# Altium PCB placaConversor.PcbDoc
Units mm, origin at the board's own origin, x right, y up, seen from the top; angles counter-clockwise.
Board outline 165 x 67.5 mm, 2 copper layers (Top Layer, Bottom Layer); 113 components, 68 nets, 284 pads, 59 vias.
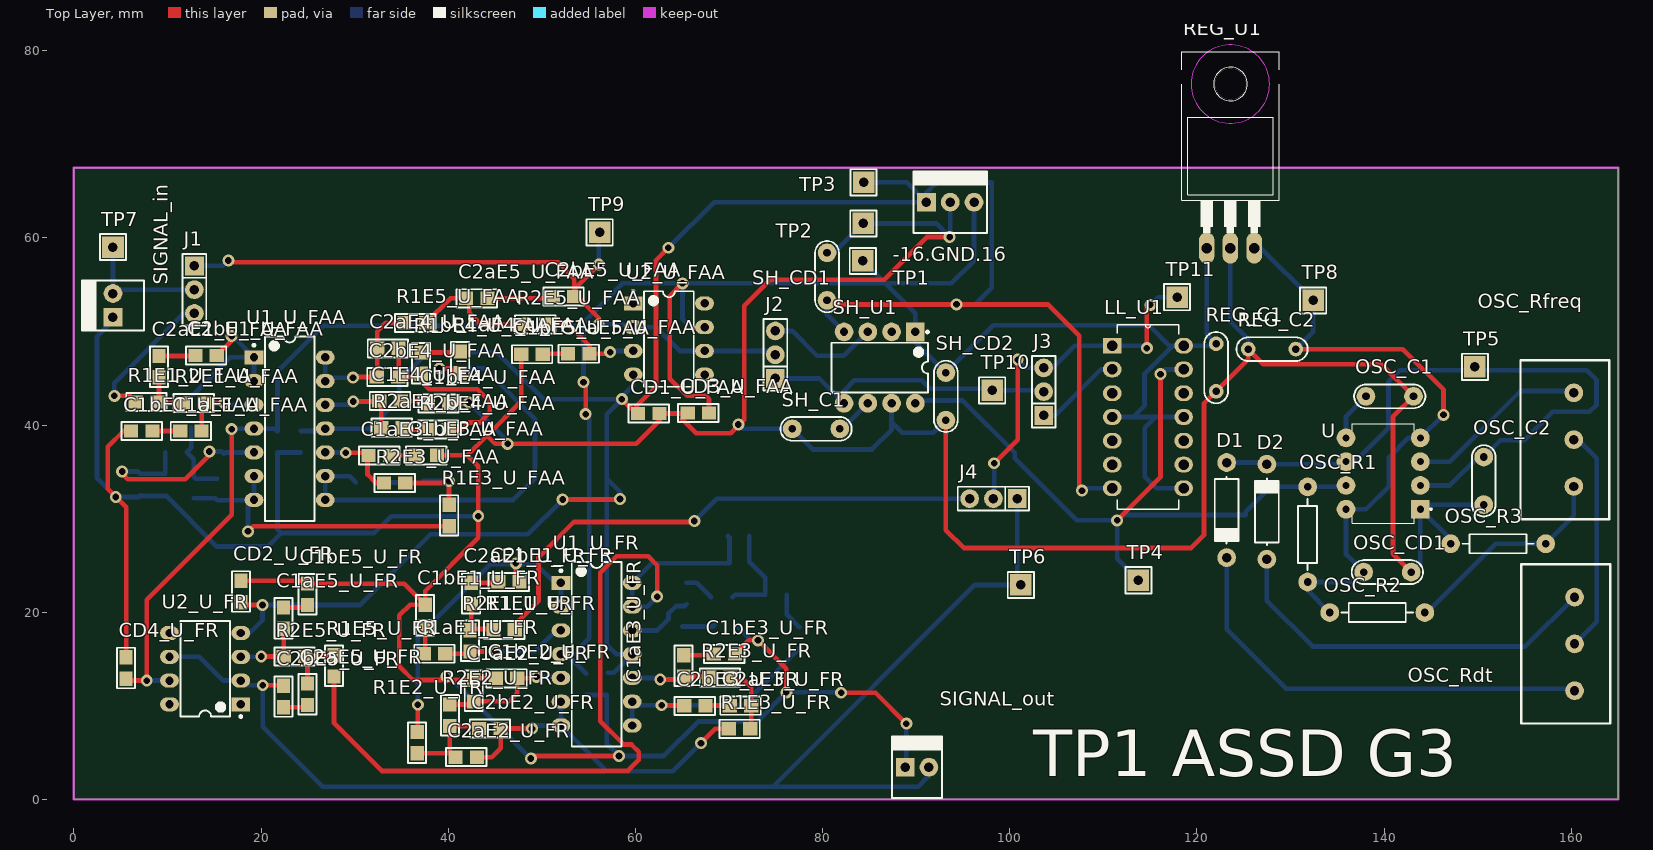
[diagram p0: Top Layer view]
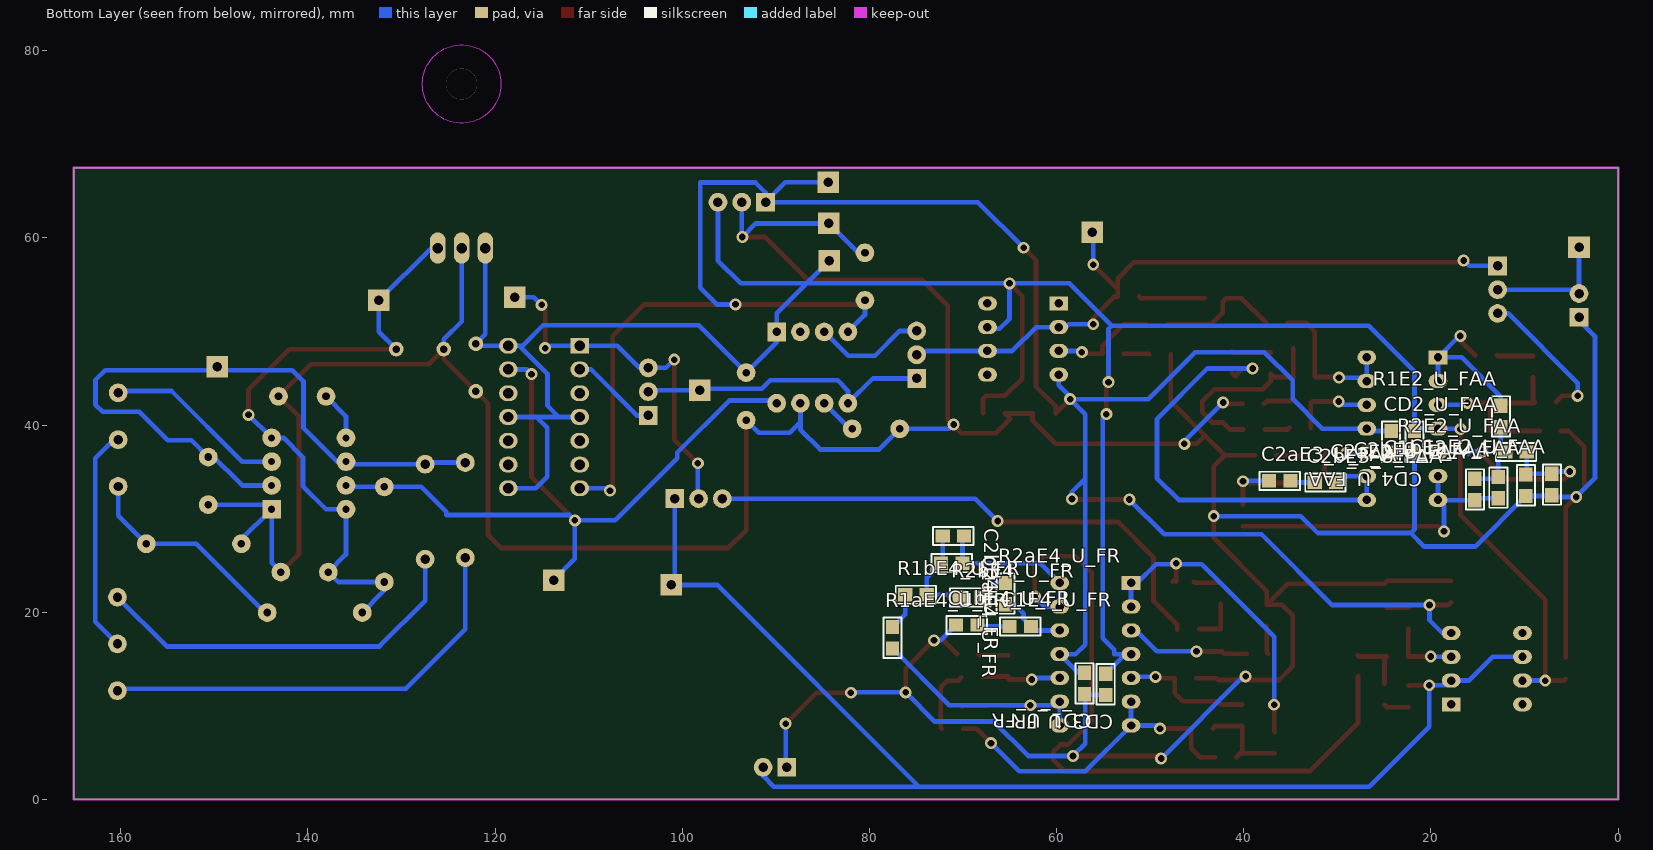
[diagram p1: Bottom Layer view, seen from below]
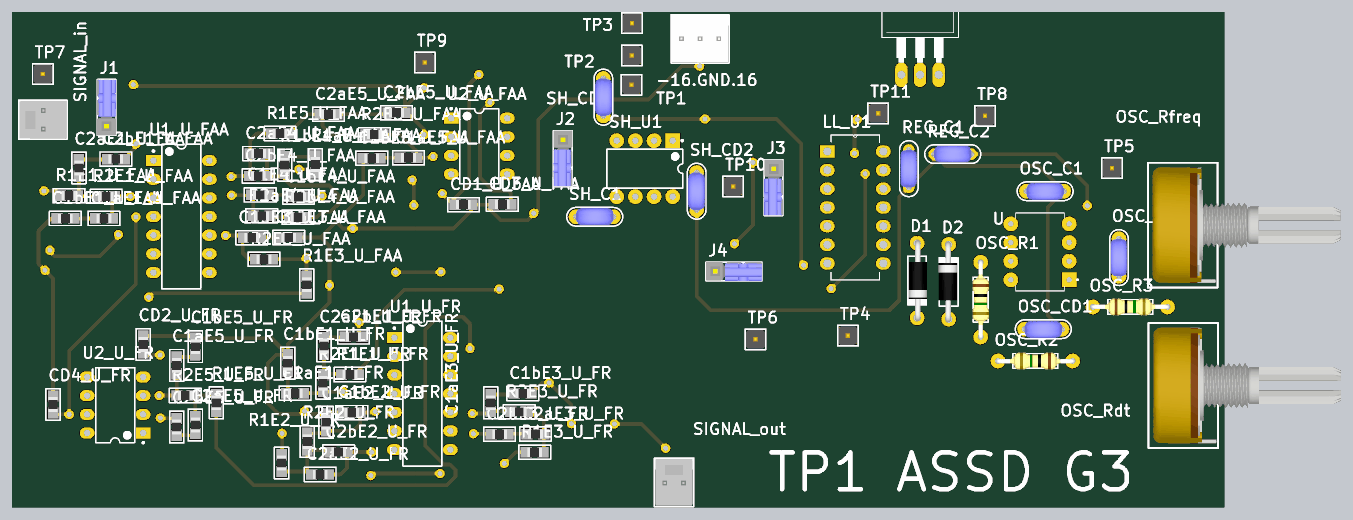
[diagram p2: 3D render of the assembled board from above, using the file's embedded part models]
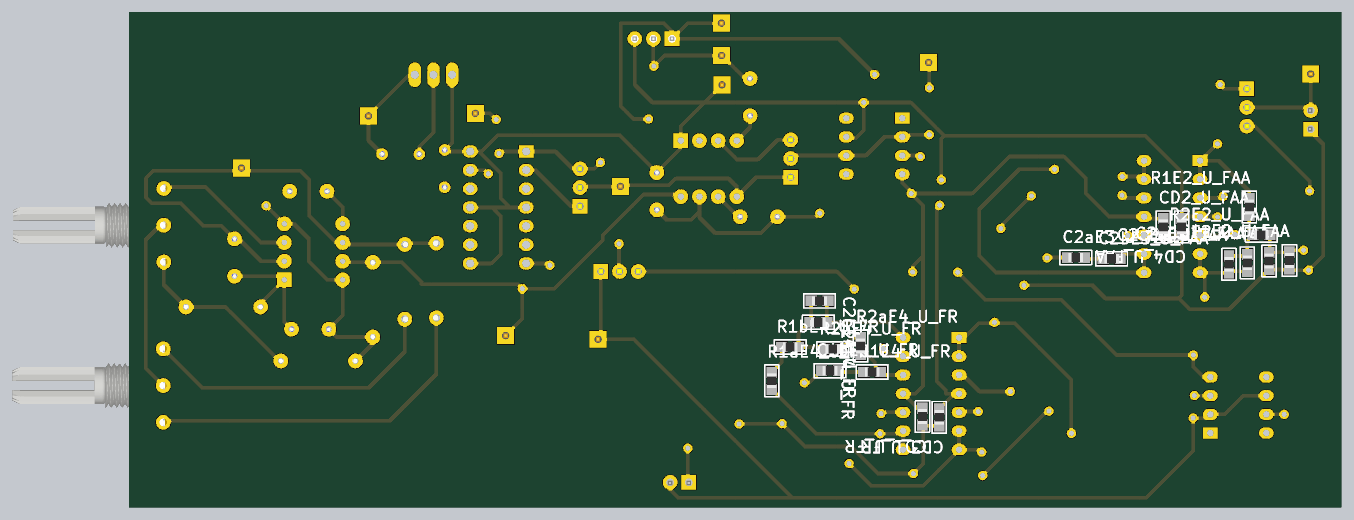
[diagram p3: 3D render of the assembled board from below, using the file's embedded part models]

## Layer stack, top to bottom
Top Solder: solder mask 0.0102, Solder Resist, Dk 3.5
Top Layer: signal copper 0.0356
Dielectric 1: dielectric 0.32, FR-4, Dk 4.8
Bottom Layer: signal copper 0.0356
Bottom Solder: solder mask 0.0102, Solder Resist, Dk 3.5

## Board outline
0,0 165,0 165,67.5 0,67.5

## Design rules (kind name [scope] priority, off if disabled: settings)
Clearance [All] p1: gap=0.254
PolygonConnect [All] p1: connectstyle=Relief reliefconductorwidth=0.254 reliefentries=4 polygonreliefangle="90 Angle" airgapwidth=0.254
RoutingVias [All] p1: holewidth=0.711 width=1.27 viastyle="Through Hole" minholewidth=0.711 minwidth=1.27 maxholewidth=0.711 maxwidth=1.27
SolderMaskExpansion [All] p1: expansion=0.102
Width [All] p1: maxlimit=0.5 minlimit=0.5 preferedwidth=0.5
30 further rules are at their usual default settings.

## Classes and differential pairs
component class main: -16.GND.16 J1 J2 J3 J4 SIGNAL_in SIGNAL_out TP1 TP2 TP3 TP4 TP5 TP6 TP7 TP8 TP9 TP10 TP11
component class U_FAA: C1aE1_U_FAA C1aE2_U_FAA C1aE3_U_FAA C1aE5_U_FAA C1bE1_U_FAA C1bE2_U_FAA C1bE3_U_FAA C1bE4_U_FAA C1bE5_U_FAA C1E4_U_FAA C2aE1_U_FAA C2aE2_U_FAA C2aE3_U_FAA C2aE4_U_FAA C2aE5_U_FAA C2bE1_U_FAA C2bE2_U_FAA C2bE3_U_FAA C2bE4_U_FAA C2bE5_U_FAA CD1_U_FAA CD2_U_FAA CD3_U_FAA CD4_U_FAA R1aE4_U_FAA R1bE4_U_FAA R1E1_U_FAA R1E2_U_FAA R1E3_U_FAA R1E5_U_FAA R2aE4_U_FAA R2bE4_U_FAA R2E1_U_FAA R2E2_U_FAA R2E3_U_FAA R2E5_U_FAA U1_U_FAA U2_U_FAA
component class U_FR: C1aE1_U_FR C1aE2_U_FR C1aE3_U_FR C1aE5_U_FR C1bE1_U_FR C1bE2_U_FR C1bE3_U_FR C1bE4_U_FR C1bE5_U_FR C1E4_U_FR C2aE1_U_FR C2aE2_U_FR C2aE3_U_FR C2aE4_U_FR C2aE5_U_FR C2bE1_U_FR C2bE2_U_FR C2bE3_U_FR C2bE4_U_FR C2bE5_U_FR CD1_U_FR CD2_U_FR CD3_U_FR CD4_U_FR R1aE4_U_FR R1bE4_U_FR R1E1_U_FR R1E2_U_FR R1E3_U_FR R1E5_U_FR R2aE4_U_FR R2bE4_U_FR R2E1_U_FR R2E2_U_FR R2E3_U_FR R2E5_U_FR U1_U_FR U2_U_FR
component class U_Llave_analogica: LL_U1
component class U_Oscilador: D1 D2 OSC_C1 OSC_C2 OSC_CD1 OSC_R1 OSC_R2 OSC_R3 OSC_Rdt OSC_Rfreq
component class U_Regulator: REG_C1 REG_C2 REG_U1
component class U_Sample_and_hold: SH_C1 SH_CD1 SH_CD2 SH_U1
channel class Filtro: U_FAA U_FR

## Components (designator, comment, footprint, x,y, rotation, side; value= is the part's Value field where it differs from the comment)
-16.GND.16 "MOLEX3" MOLEX3 91.1,63.825 r0 top (schematic designator POWER)
C1aE1_U_FAA "CAP" 0805 12.5,39.375 r180 top (schematic designator C1aE1)
C1aE1_U_FR "CAP" 0805 38.525,15.575 r180 top (schematic designator C1aE1)
C1aE2_U_FAA "CAP" 0805 7.075,33.65 r270 bottom (schematic designator C1aE2)
C1aE2_U_FR "CAP" 0805 42.725,11.625 r90 top (schematic designator C1aE2)
C1aE3_U_FAA "CAP" 0805 32.625,36.75 r0 top (schematic designator C1aE3)
C1aE3_U_FR "CAP" 0805 65.15,14.275 r90 top (schematic designator C1aE3)
C1aE5_U_FAA "CAP" 0805 53.95,47.625 r180 top (schematic designator C1aE5)
C1aE5_U_FR "CAP" 0805 22.4,19.375 r90 top (schematic designator C1aE5)
C1bE1_U_FAA "CAP" 0805 7.25,39.375 r180 top (schematic designator C1bE1)
C1bE1_U_FR "CAP" 0805 37.525,19.675 r90 top (schematic designator C1bE1)
C1bE2_U_FAA "CAP" 0805 9.85,33.575 r270 bottom (schematic designator C1bE2)
C1bE2_U_FR "CAP" 0805 46.225,12.95 r180 top (schematic designator C1bE2)
C1bE3_U_FAA "CAP" 0805 37.65,36.775 r0 top (schematic designator C1bE3)
C1bE3_U_FR "CAP" 0805 69.5,15.55 r0 top (schematic designator C1bE3)
C1bE4_U_FAA "CAP" 0805 38.975,42.3 r0 top (schematic designator C1bE4)
C1bE4_U_FR "CAP" 0805 69.6,18.65 r0 bottom (schematic designator C1bE4)
C1bE5_U_FAA "CAP" 0805 48.95,47.575 r180 top (schematic designator C1bE5)
C1bE5_U_FR "CAP" 0805 24.95,21.925 r90 top (schematic designator C1bE5)
C1E4_U_FAA "CAP" 0805 33.775,42.575 r0 top (schematic designator C1E4)
C1E4_U_FR "CAP" 0805 63.875,18.475 r0 bottom (schematic designator C1E4)
C2aE1_U_FAA "CAP" 0805 9.1,46.25 r90 top (schematic designator C2aE1)
C2aE1_U_FR "CAP" 0805 42.45,22.025 r90 top (schematic designator C2aE1)
C2aE2_U_FAA "CAP" 0805 15.3,33.125 r270 bottom (schematic designator C2aE2)
C2aE2_U_FR "CAP" 0805 41.925,4.525 r0 top (schematic designator C2aE2)
C2aE3_U_FAA "CAP" 0805 36.15,34.05 r180 bottom (schematic designator C2aE3)
C2aE3_U_FR "CAP" 0805 71.225,10.025 r180 top (schematic designator C2aE3)
C2aE4_U_FAA "CAP" 0805 33.55,48.2 r180 top (schematic designator C2aE4)
C2aE4_U_FR "CAP" 0805 71.2,25.25 r180 bottom (schematic designator C2aE4)
C2aE5_U_FAA "CAP" 0805 43.05,53.55 r0 top (schematic designator C2aE5)
C2aE5_U_FR "CAP" 0805 24.95,11.25 r270 top (schematic designator C2aE5)
C2bE1_U_FAA "CAP" 0805 14.125,47.45 r0 top (schematic designator C2bE1)
C2bE1_U_FR "CAP" 0805 46.475,23.25 r0 top (schematic designator C2bE1)
C2bE2_U_FAA "CAP" 0805 12.8,33.325 r270 bottom (schematic designator C2bE2)
C2bE2_U_FR "CAP" 0805 44.45,7.575 r0 top (schematic designator C2bE2)
C2bE3_U_FAA "CAP" 0805 31.275,33.875 r180 bottom (schematic designator C2bE3)
C2bE3_U_FR "CAP" 0805 66.35,10 r180 top (schematic designator C2bE3)
C2bE4_U_FAA "CAP" 0805 33.5,45.15 r180 top (schematic designator C2bE4)
C2bE4_U_FR "CAP" 0805 71.025,28.15 r180 bottom (schematic designator C2bE4)
C2bE5_U_FAA "CAP" 0805 52.325,53.75 r0 top (schematic designator C2bE5)
C2bE5_U_FR "CAP" 0805 22.4,11 r90 top (schematic designator C2bE5)
CD1_U_FAA "CAP" 0805 61.425,41.25 r0 top (schematic designator CD1)
CD1_U_FR "CAP" 0805 57.025,12.4 r270 bottom (schematic designator CD1)
CD2_U_FAA "CAP" 0805 24.25,38.225 r270 bottom (schematic designator CD2)
CD2_U_FR "CAP" 0805 17.85,22.225 r90 top (schematic designator CD2)
CD3_U_FAA "CAP" 0805 66.725,41.3 r180 top (schematic designator CD3)
CD3_U_FR "CAP" 0805 54.75,12.3 r270 bottom (schematic designator CD3)
CD4_U_FAA "CAP" 0805 21.75,38.225 r270 bottom (schematic designator CD4)
CD4_U_FR "CAP" 0805 5.575,14.05 r90 top (schematic designator CD4)
D1 "1n4148" DO41 123.175,30.925 r270 top
D2 "1n4148" DO41 127.475,30.75 r90 top
J1 "J_FAA" JUMPER3 12.875,54.475 r270 top
J2 "J_SH" JUMPER3 74.95,47.525 r90 top
J3 "J_LL" JUMPER3 103.625,43.575 r90 top
J4 "J_FR" JUMPER3 98.25,32.15 r180 top
LL_U1 "CD4066BE" DIP254P762X508-14 118.575,33.25 r0 top
OSC_C1 "10n" CAP200#1 140.6,43.075 r0 top
OSC_C2 "1n" CAP200#1 150.65,34.05 r270 top
OSC_CD1 "100n" CAP200#1 140.35,24.3 r0 top
OSC_R1 "2k2" RES400 131.825,33.4 r270 top
OSC_R2 "10k" RES400 144.35,19.975 r180 top
OSC_R3 "10k" RES400 147.1,27.325 r0 top
OSC_Rdt "45k" POTENCIOMETRO 160.35,16.625 r90 top
OSC_Rfreq "4k" POTENCIOMETRO 160.275,38.45 r90 top
R1aE4_U_FAA "RES" 0805 41.275,46.725 r90 top (schematic designator R1aE4)
R1aE4_U_FR "RES" 0805 77.525,17.275 r90 bottom (schematic designator R1aE4)
R1bE4_U_FAA "RES" 0805 37.1,46.625 r270 top (schematic designator R1bE4)
R1bE4_U_FR "RES" 0805 75.025,21.875 r180 bottom (schematic designator R1bE4)
R1E1_U_FAA "RES" 0805 7.75,42.475 r0 top (schematic designator R1E1)
R1E1_U_FR "RES" 0805 45.975,18.125 r180 top (schematic designator R1E1)
R1E2_U_FAA "RES" 0805 12.525,40.925 r270 bottom (schematic designator R1E2)
R1E2_U_FR "RES" 0805 36.675,6.075 r270 top (schematic designator R1E2)
R1E3_U_FAA "RES" 0805 40.1,30.35 r90 top (schematic designator R1E3)
R1E3_U_FR "RES" 0805 71.125,7.55 r0 top (schematic designator R1E3)
R1E5_U_FAA "RES" 0805 36.475,50.925 r0 top (schematic designator R1E5)
R1E5_U_FR "RES" 0805 27.8,14.275 r90 top (schematic designator R1E5)
R2aE4_U_FAA "RES" 0805 33.975,39.725 r180 top (schematic designator R2aE4)
R2aE4_U_FR "RES" 0805 65.45,22 r270 bottom (schematic designator R2aE4)
R2bE4_U_FAA "RES" 0805 38.9,39.525 r180 top (schematic designator R2bE4)
R2bE4_U_FR "RES" 0805 69.225,21.6 r180 bottom (schematic designator R2bE4)
R2E1_U_FAA "RES" 0805 12.8,42.375 r0 top (schematic designator R2E1)
R2E1_U_FR "RES" 0805 42.325,16.95 r270 top (schematic designator R2E1)
R2E2_U_FAA "RES" 0805 10.9,37.125 r180 bottom (schematic designator R2E2)
R2E2_U_FR "RES" 0805 40.175,9 r90 top (schematic designator R2E2)
R2E3_U_FAA "RES" 0805 34.275,33.825 r180 top (schematic designator R2E3)
R2E3_U_FR "RES" 0805 69.025,13.05 r180 top (schematic designator R2E3)
R2E5_U_FAA "RES" 0805 49.3,50.775 r0 top (schematic designator R2E5)
R2E5_U_FR "RES" 0805 23.575,15.275 r180 top (schematic designator R2E5)
REG_C1 "0.22uF" CAP200#2 122.05,46.15 r270 top
REG_C2 "0.1uF" CAP200#2 128.025,48.125 r180 top
REG_U1 "LM7805" TO220 123.575,65.275 r0 top
SH_C1 "4n" CAP200#1 79.3,39.6 r180 top
SH_CD1 "100n" CAP200#1 80.475,55.875 r90 top
SH_CD2 "100n" CAP200#1 93.175,43.075 r270 top
SH_U1 "LF398N" N08E 86.1,46.15 r270 top
SIGNAL_in "ALOJ_POL1" MOLEX2 4.175,51.525 r90 top
SIGNAL_out "ALOJ_POL1" MOLEX2 88.825,3.45 r0 top
TP1 "16V" TPTH 84.3,57.55 r0 top
TP2 "GND" TPTH 84.35,61.55 r0 top
TP3 "-16V" TPTH 84.375,65.95 r0 top
TP4 "PULSE" TPTH 113.75,23.425 r0 top
TP5 "OSC_CAP" TPTH 149.7,46.225 r0 top
TP6 "SIGNAL_OUT" TPTH 101.175,22.925 r0 top
TP7 "SIGNAL_IN" TPTH 4.175,59.025 r0 top
TP8 "5V" TPTH 132.425,53.325 r0 top
TP9 "FAA_OUT" TPTH 56.175,60.6 r0 top
TP10 "SH_OUT" TPTH 98.125,43.725 r90 top
TP11 "LL_OUT" TPTH 117.875,53.675 r0 top
U "NE555" DIP794W45P254L1060H508Q8 139.9,34.825 r180 top
U1_U_FAA "TL084ACNE4" TI-N14 23.05,39.625 r0 top (schematic designator U1)
U1_U_FR "TL084ACNE4" TI-N14 55.85,15.525 r0 top (schematic designator U1)
U2_U_FAA "TL081ACP" TI-P8 63.575,49.2 r0 top (schematic designator U2)
U2_U_FR "TL081ACP" TI-P8 14.025,13.975 r180 top (schematic designator U2)

## Footprints (in the part's own frame and the unit in brackets; to place one, negate y for a bottom-side part, rotate by r counter-clockwise, add the part's x,y. Pads: shape width x height; smd on the part's side, far side on the other; paste and mask are expansions set on the pad)
0805 [mil] "Pasivo 0805"
  rect 60x56 smd: 1(-45,0) 2(45,0)
  silkscreen extent -85,-38 85,38, body extent -40,-25 39,25, height 15
CAP200#1 [mm]
  round 2 hole 0.813: 1(-2.54,0) 2(2.54,0)
  silkscreen extent -3.81,-1.27 3.81,1.27, body extent -2.79,-1.17 2.79,1.12, height 6.24
CAP200#2 [mm]
  round 1.575 hole 0.813: 1(-2.54,0) 2(2.54,0)
  silkscreen extent -3.81,-1.27 3.81,1.27, body extent -2.79,-1.17 2.79,1.12, height 6.24
DIP254P762X508-14 [mil]
  rect 78.74x66 hole 44: 1(-300,600)
  oval 78.74x66 hole 44: 2(-300,500) 3(-300,400) 4(-300,300) 5(-300,200) 6(-300,100) 7(-300,0) 8(0,0) 9(0,100) 10(0,200) 11(0,300) 12(0,400) 13(0,500) 14(0,600)
  silkscreen extent -280,-88 -20,688
DIP794W45P254L1060H508Q8 [mm]
  rect 2x2 hole 0.76: 1(-3.97,3.81)
  round 2 hole 0.76: 2(-3.97,1.27) 3(-3.97,-1.27) 4(-3.97,-3.81) 5(3.97,-3.81) 6(3.97,-1.27) 7(3.97,1.27) 8(3.97,3.81)
  silkscreen extent -5.2,-5.3 3.3,5.3
DO41 [mm]
  round 2 hole 1.016: 1(-5.08,0) 2(5.08,0)
  silkscreen extent -3.56,-1.27 3.56,1.27, body extent -5.46,-1.19 5.46,1.37, height 2.03
JUMPER3 [mm]
  rect 2x2 hole 1.016: 1(-2.54,0)
  round 2 hole 1.016: 2(0,0) 3(2.54,0)
  silkscreen extent -3.81,-1.27 3.81,1.27, body extent -3.81,-1.3 3.81,1.27, height 16.15
MOLEX2 [mm]
  rect 2x2 hole 1.016: 1(0,0)
  round 2 hole 1.016: 2(2.54,0)
  silkscreen extent -1.4,-3.3 3.94,3.3, body extent -1.27,-3.17 3.81,3.18, height 10.74
MOLEX3 [mm]
  rect 2x2 hole 1.016: 1(0,0)
  round 2 hole 1.016: 2(2.54,0) 3(5.08,0)
  silkscreen extent -1.4,-3.3 6.48,3.3, body extent -1.27,-3.17 6.35,3.17, height 10.74
N08E [mm] "DIP, 8-Pin, Row Spacing 7.62 mm, Pitch 2.54 mm"
  rect 2x2 hole 0.9: 1(-3.81,3.81)
  round 2 hole 0.9: 2(-3.81,1.27) 3(-3.81,-1.27) 4(-3.81,-3.81) 5(3.81,-3.81) 6(3.81,-1.27) 7(3.81,1.27) 8(3.81,3.81)
  silkscreen extent -3.93,-5.15 2.65,5.24, body extent -3.6,-5.15 3.6,5.15, height 5.33
POTENCIOMETRO [mm]
  round 2 hole 1: 1(-5,0) 2(0,0) 3(5,0)
  silkscreen extent -8.5,-3.8 8.5,5.7, body extent -7.87,-20.53 7.87,5.03, height 20.12
RES400 [mm]
  round 2 hole 0.813: 1(0,0) 2(10.16,0)
  silkscreen extent 1.27,-1.02 8.89,1.02, body extent -0.3,-1.14 10.46,1.17, height 2.43
TI-N14 [mm] "DIP, 14-Leads, Body 19.305x6.35 mm, Pitch 2.54 mm"
  rect 2x1.5 hole 0.9: 1(-3.81,7.62)
  oval 2x1.5 hole 0.9: 2(-3.81,5.08) 3(-3.81,2.54) 4(-3.81,0) 5(-3.81,-2.54) 6(-3.81,-5.08) 7(-3.81,-7.62) 8(3.81,-7.62) 9(3.81,-5.08) 10(3.81,-2.54) 11(3.81,0) 12(3.81,2.54) 13(3.81,5.08) 14(3.81,7.62)
  silkscreen extent -3.93,-9.85 2.65,9.85, body extent -3.3,-9.85 3.3,9.85, height 5.08
TI-P8 [mm] "DIP, 8-Leads, Body 9.59x6.35mm, Pitch 2.54mm"
  rect 2x1.5 hole 0.9: 1(-3.81,3.81)
  oval 2x1.5 hole 0.9: 2(-3.81,1.27) 3(-3.81,-1.27) 4(-3.81,-3.81) 5(3.81,-3.81) 6(3.81,-1.27) 7(3.81,1.27) 8(3.81,3.81)
  silkscreen extent -3.93,-5.1 2.65,5.23, body extent -3.95,-5.07 3.95,5.07, height 5.08
TO220 [mil]
  oval 66x132 hole 44: 1(-100,-250) 2(0,-250) 3(100,-250)
  round 130 hole 130 unplated: ""(0,440)
  Keep-Out Layer circle w0: c0,440 r165
  Keep-Out Layer circle w0: c0,440 r165
  silkscreen extent -205,-185 205,575
TPTH [mm]
  rect 2.3x2.3 hole 1.016: 1(0,0)
  silkscreen extent -1.4,-1.4 1.4,1.4, body extent -1.27,-1.27 1.27,1.27, height 6.04

## Part data
D1 D2: library part DIODO
J1 J2 J3 J4: library part JUMPER3
LL_U1: "Bilateral, FET Switches 1 x 1:1 14-PDIP"
OSC_C1 OSC_C2 OSC_CD1 REG_C1 REG_C2 SH_C1 SH_CD1 SH_CD2: library part CAP
OSC_R1 OSC_R2 OSC_R3: library part RES
OSC_Rdt OSC_Rfreq: library part POTENCIOMETRO
REG_U1: "Linear Voltage Regulator IC 1 Output 1.5A SOT-223-4"
SH_U1: "Monolithic Sample and Hold Circuits, 8-pin MDIP"
SIGNAL_in SIGNAL_out: library part MOLEX2
TP1 TP2 TP3 TP4 TP5 TP6 TP7 TP8 TP9 TP10 TP11: library part TP
U: "555 Type, Timer/Oscillator _Single_ IC 100kHz 8-SOIC"
U1_U_FAA U1_U_FR: "JFET-Input Operational Amplifier, 7 to 36 V, 0 to 70 degC, 14-pin DIP (N14), Pb-Free (RoHS)"
U2_U_FAA U2_U_FR: "JFET-Input Operational Amplifier, 7 to 36 V, 0 to 70 degC, 8-pin DIP (P8), Pb-Free (RoHS)"

## Via types
v1: diameter 1.27, hole 0.711, Top Layer to Bottom Layer, 59 vias

## Nets (pads, with @x,y where several pads share a name; then routed paths per layer and width w, separated by ;. In a path a pad name is that pad's centre, name@x,y a point inside that pad or via, vN(x,y) a via of type N, cw(c..) or ccw(c..) an arc to the next point about the centre after c; other vN are vias at no path point)
16V: -16.GND.16.3 CD3_U_FAA.1 CD3_U_FR.1 CD4_U_FAA.1 CD4_U_FR.1 LL_U1.4 LL_U1.8 LL_U1.11 LL_U1.14 REG_C1.1 REG_U1.1 SH_CD2.1 SH_U1.1 TP1.1 U1_U_FAA.4 U1_U_FR.4 U2_U_FAA.7 U2_U_FR.7 | length 283.7
  Top Layer w0.5: CD4_U_FR.1 5.777,12.705 v1(7.78,12.705) 7.78,21.355 16.85,30.425 v1(16.85,39.575) ; v1(54.45,44.6) 54.675,44.375 v1(54.675,41.175) ; v1(65.025,55.15) 63.675,53.8 63.675,44.975 65.525,43.125 67.5,43.125 67.868,42.757 CD3_U_FAA.1
  Bottom Layer w0.5: v1(7.78,12.705) U2_U_FR.7 ; v1(16.85,39.575) 16.9,39.625 U1_U_FAA.4 21.493,39.625 CD4_U_FAA.1 21.75,45.725 26.65,50.625 54.1,50.625 ; U1_U_FR.4 U1_U_FR.4@52.668,15.525 ; v1(54.45,44.6) 54.45,50.275 54.1,50.625 ; v1(54.675,41.175) 55.075,40.775 55.075,17.225 53.85,16 53.85,15.525 U1_U_FR.4@52.668,15.525 ; CD3_U_FR.1 U1_U_FR.4@52.668,15.525 ; U2_U_FAA.7 67.215,50.3 66.1,50.3 65.025,51.375 v1(65.025,55.15) ; TP1.1 86.7,55.15 ; -16.GND.16.3 96.18,57.58 93.75,55.15 86.7,55.15 ; LL_U1.4 113.17,40.87 ; LL_U1.8 115.675,33.25 114.425,34.5 114.425,39.72 115.575,40.87 ; LL_U1.11 115.575,40.87 ; REG_U1.1 121.035,49.705 REG_C1.1 ; REG_C1.1@122.05,48.49 LL_U1.14 117.415,48.49 ; 54.1,50.625 58.625,55.15 v1(65.025,55.15) ; v1(65.025,55.15) 86.7,55.15 ; 86.7,55.15 89.91,51.94 SH_U1.1 89.91,48.88 SH_CD2.1 98.235,50.675 114.875,50.675 117.06,48.49 117.415,48.49 ; 113.17,40.87 114.4,42.1 114.4,45.475 117.415,48.49 ; 113.17,40.87 115.575,40.87
-16V: -16.GND.16.1 CD1_U_FAA.1 CD1_U_FR.1 CD2_U_FAA.1 CD2_U_FR.1 LL_U1.7 SH_CD1.1 SH_U1.4 TP3.1 U1_U_FAA.11 U1_U_FR.11 U2_U_FAA.4 U2_U_FR.4 | length 265.5
  Top Layer w0.5: CD2_U_FR.1 18.157,20.775 v1(20.15,20.775) ; v1(52.225,32.05) 58.3,32.05 v1(58.35,32.1) ; v1(58.55,42.775) 60.075,41.25 60.075,42 62.2,44.125 62.2,57.625 v1(63.525,58.95) ; SH_CD1.1 80.91,52.9 v1(94.3,52.9) 104.075,52.9 107.425,49.55 107.425,33.3 v1(107.725,33)
  Bottom Layer w0.5: U2_U_FR.4 18.76,17.785 20.15,19.175 v1(20.15,20.775) 30.55,20.775 38.1,28.325 48.5,28.325 v1(52.225,32.05) ; CD2_U_FAA.1 26.603,39.368 U1_U_FAA.11 31.6,39.625 34.775,42.8 34.775,44.775 37.8,47.8 45.2,47.8 50.225,42.775 v1(58.55,42.775) ; CD1_U_FR.1 57.678,13.543 U1_U_FR.11 57.975,15.525 56.95,16.55 56.95,34.275 ; v1(58.35,32.1) 58.35,32.875 56.95,34.275 ; U2_U_FAA.4 59.765,44.265 58.55,43.05 v1(58.55,42.775) ; v1(63.525,58.95) 68.4,63.825 -16.GND.16.1 ; SH_CD1.1 80.475,51.775 SH_U1.4 ; TP3.1 88.975,65.95 -16.GND.16.1 ; v1(94.3,52.9) 96.3,52.9 98.075,54.675 98.075,65.925 92.175,65.925 91.1,64.85 -16.GND.16.1 ; v1(107.725,33) 107.975,33.25 LL_U1.7 ; 56.95,34.275 56.95,41.175 v1(58.55,42.775)
FGND_U_FAA: -16.GND.16.2 C1aE2_U_FAA.2 C1aE2_U_FR.2 C1bE1_U_FAA.2 C1bE1_U_FR.2 C1bE2_U_FAA.2 C1bE2_U_FR.2 C1bE3_U_FAA.2 C1bE3_U_FR.2 C1bE4_U_FAA.2 C1bE4_U_FR.2 C1bE5_U_FAA.2 C1bE5_U_FR.2 CD1_U_FAA.2 CD1_U_FR.2 CD2_U_FAA.2 CD2_U_FR.2 CD3_U_FAA.2 CD3_U_FR.2 CD4_U_FAA.2 CD4_U_FR.2 OSC_C1.2 OSC_C2.2 OSC_CD1.2 OSC_R3.1 REG_C1.2 REG_C2.2 REG_U1.2 SH_C1.2 SH_CD1.2 SH_CD2.2 SH_U1.7 SIGNAL_in.1 SIGNAL_out.1 TP2.1 U.1 | length 518.5
  Top Layer w0.5: CD4_U_FR.2 5.575,31.225 v1(4.475,32.325) 3.6,33.2 3.6,37.675 5.3,39.375 C1bE1_U_FAA.2 ; CD2_U_FR.2 24.65,23.368 C1bE5_U_FR.2 35.275,23.068 C1bE1_U_FR.2 ; C1bE3_U_FAA.2 42.025,36.775 ; C1bE4_U_FAA.2 42.075,42.3 v1(42.2,42.425) ; C1bE2_U_FR.2 42.907,12.95 C1aE2_U_FR.2 36.232,12.768 34.775,14.225 34.775,19.675 35.918,20.818 C1bE1_U_FR.2 ; C1bE5_U_FAA.2 47.807,42.557 44.138,38.888 ; v1(48.825,4.375) 49.1,4.65 v1(58.25,4.65) ; C1bE3_U_FR.2 72.093,17 v1(73.1,17) 76.125,13.975 v1(76.125,11.45) ; v1(81.975,11.4) 85.65,11.4 v1(88.95,8.1) ; SH_CD2.2 93.175,28.775 95.075,26.875 119.375,26.875 120.75,28.25 120.75,42.31 REG_C1.2 125.485,47.045 REG_C2.2 127.093,46.517 139.698,46.517 OSC_C1.2 140.94,40.875 140.94,26.25 OSC_CD1.2 ; v1(93.575,60.1) 91.15,60.1 86.6,55.55 74.4,55.55 71.613,52.763 71.613,40.562 70.175,39.125 66.475,39.125 64.941,40.659 65.532,41.25 CD1_U_FAA.2 62.568,40.493 60.075,38 v1(46.35,38) 45.025,38 44.138,38.888 ; C1bE1_U_FR.2 37.525,22.275 43.2,27.95 v1(43.2,30.275) 43.2,35.6 42.025,36.775 ; 42.025,36.775 44.138,38.888
  Bottom Layer w0.5: SIGNAL_in.1 4.175,51.175 2.475,49.475 2.475,34.325 v1(4.475,32.325) 6.893,32.325 C1aE2_U_FAA.2 7.15,32.432 C1bE2_U_FAA.2 15.257,27.025 20.7,27.025 22.15,28.475 ; CD2_U_FAA.2 CD4_U_FAA.2 21.75,28.875 22.15,28.475 ; v1(39.8,13.15) 40.05,13.15 v1(48.825,4.375) ; v1(42.2,42.425) 46.35,38.275 v1(46.35,38) ; v1(43.2,30.275) 33.9,30.275 32.1,28.475 22.15,28.475 ; CD3_U_FR.2 56.925,11.157 56.925,5.975 v1(58.25,4.65) 63.025,4.65 66.7,8.325 73,8.325 v1(76.125,11.45) 81.925,11.45 v1(81.975,11.4) ; C1bE4_U_FR.2 72.393,17 v1(73.1,17) ; v1(71,40.075) 71.475,39.6 SH_C1.2 78.96,37.4 85.275,37.4 87.37,39.495 87.37,40.305 ; SH_CD1.2 81.215,58.415 TP2.1 92.125,61.55 v1(93.575,60.1) ; SH_U1.7 87.37,40.305 ; SIGNAL_out.1 88.95,3.575 v1(88.95,8.1) ; SH_CD2.2 91.815,39.175 88.5,39.175 87.37,40.305 ; v1@93.64,60.1 -16.GND.16.2 ; REG_U1.2 123.575,51.075 125.485,49.165 REG_C2.2 ; OSC_CD1.2 143.87,25.28 U.1 ; OSC_R3.1 147.1,27.785 U.1 ; OSC_C2.2 144.365,31.51 U.1
FIN_U_FAA: J1.3 R1E1_U_FAA.1 | length 15.6
  Top Layer w0.5: v1(4.325,43.125) 5.957,43.125 R1E1_U_FAA.1
  Bottom Layer w0.5: v1(4.325,43.125) 4.325,44.5 11.76,51.935 J1.3
FIN_U_FR: J4.3 R1E1_U_FR.1 | length 57.4
  Top Layer w0.5: R1E1_U_FR.1 47.118,18.693 49.65,21.225 49.65,25.9 53.4,29.65 v1@66.25,29.65
  Bottom Layer w0.5: v1(66.3,29.75) 68.7,32.15 J4.3
FOUT_U_FAA: C2bE5_U_FAA.2 J1.1 J2.2 TP9.1 U2_U_FAA.2 U2_U_FAA.6 | length 73.8
  Top Layer w0.5: v1@16.5,57.39 51.735,57.39 53.468,55.657 53.468,54.543 ; v1(56.075,50.775) 56.075,51.45 53.775,53.75 C2bE5_U_FAA.2 53.468,54.543 ; v1(56.075,57.15) 53.468,54.543
  Bottom Layer w0.5: J1.1 15.915,57.015 v1(16.5,57.6) ; v1(56.075,50.775) 58.71,50.775 U2_U_FAA.2@59.065,50.42 ; v1(56.075,57.15) 56.075,60.5 TP9.1 ; U2_U_FAA.2 62.18,50.47 64.72,47.93 U2_U_FAA.6 J2.2@74.545,47.93
FOUT_U_FR: C2bE5_U_FR.2 J4.1 SIGNAL_out.2 TP6.1 U2_U_FR.2 U2_U_FR.6 | length 137
  Top Layer w0.5: v1(20.175,12.2) 22.343,12.2 C2bE5_U_FR.2
  Bottom Layer w0.5: U2_U_FR.6 13.405,15.245 15.945,12.705 U2_U_FR.2 18.34,12.2 v1(20.175,12.2) 20.175,7.775 26.6,1.35 74.7,1.35 ; SIGNAL_out.2@91.365,2.515 90.2,1.35 74.7,1.35 ; J4.1 100.79,23.31 TP6.1 96.275,22.925 74.7,1.35
NetC1aE1_U_FAA_1: C1aE1_U_FAA.1 R2E1_U_FAA.2 U1_U_FAA.3 | length 8.5
  Top Layer w0.5: C1aE1_U_FAA.1 13.643,42.075 R2E1_U_FAA.2 v1(16.1,42.375)
  Bottom Layer w0.5: v1(16.1,42.375) 16.31,42.165 U1_U_FAA.3
NetC1aE1_U_FAA_2: C1aE1_U_FAA.2 C1bE1_U_FAA.1 | length 3
  Top Layer w0.5: C1bE1_U_FAA.1 C1aE1_U_FAA.2
NetC1aE1_U_FR_1: C1aE1_U_FR.1 R2E1_U_FR.2 U1_U_FR.3 | length 13.4
  Top Layer w0.5: C1aE1_U_FR.1 42.093,15.575 R2E1_U_FR.2 45.032,15.807 v1(45.05,15.825)
  Bottom Layer w0.5: v1(45.05,15.825) 49.275,15.825 51.515,18.065 U1_U_FR.3
NetC1aE1_U_FR_2: C1aE1_U_FR.2 C1bE1_U_FR.1 | length 3
  Top Layer w0.5: C1aE1_U_FR.2 37.525,15.718 C1bE1_U_FR.1
NetC1aE2_U_FAA_1: C1aE2_U_FAA.1 C1bE2_U_FAA.1 R2E2_U_FAA.2 U1_U_FAA.5 | length 23.3
  Top Layer w0.5: v1(5.15,35.05) 5.15,34.85 5.775,34.225 11.9,34.225 14.6,36.925 14.475,37.05 v1(14.475,37.175)
  Bottom Layer w0.5: v1(5.15,35.05) 6.818,35.05 C1aE2_U_FAA.1 9.775,34.793 R2E2_U_FAA.2@9.775,37.107 ; v1(14.475,37.175) 15.775,37.175 16.025,36.925 16.185,37.085 U1_U_FAA.5
NetC1aE2_U_FR_1: C1aE2_U_FR.1 C1bE2_U_FR.1 R2E2_U_FR.2 U1_U_FR.5 | length 14.1
  Top Layer w0.5: R2E2_U_FR.2 42.386,10.143 C1aE2_U_FR.1 46.507,10.482 47.368,11.343 C1bE2_U_FR.1 49.275,12.95 v1(49.425,13.1)
  Bottom Layer w0.5: v1(49.425,13.1) 51.925,13.1 U1_U_FR.5
NetC1aE3_U_FAA_1: C1aE3_U_FAA.1 R2E3_U_FAA.2 U1_U_FAA.10 | length 8.9
  Top Layer w0.5: v1(29.05,37.05) 31.182,37.05 C1aE3_U_FAA.1 ; C1aE3_U_FAA.1@31.375,36.75 31.375,34.725 32.275,33.825 R2E3_U_FAA.2
  Bottom Layer w0.5: U1_U_FAA.10 29.015,37.085 v1(29.05,37.05)
NetC1aE3_U_FAA_2: C1aE3_U_FAA.2 C1bE3_U_FAA.1 | length 2.7
  Top Layer w0.5: C1aE3_U_FAA.2 33.793,36.775 C1bE3_U_FAA.1
NetC1aE3_U_FR_1: C1aE3_U_FR.1 R2E3_U_FR.2 U1_U_FR.10 | length 8.3
  Top Layer w0.5: v1(62.65,12.825) C1aE3_U_FR.1@65.082,12.825 ; C1aE3_U_FR.1 67.8,13.132 R2E3_U_FR.2
  Bottom Layer w0.5: U1_U_FR.10 62.49,12.985 v1(62.65,12.825)
NetC1aE3_U_FR_2: C1aE3_U_FR.2 C1bE3_U_FR.1 | length 3.3
  Top Layer w0.5: C1aE3_U_FR.2 68.225,15.418 C1bE3_U_FR.1
NetC1aE5_U_FAA_1: C1aE5_U_FAA.1 R2E5_U_FAA.2 U2_U_FAA.3 | length 11.3
  Top Layer w0.5: R2E5_U_FAA.2 52.8,50.775 55.093,48.482 C1aE5_U_FAA.1 57.125,47.625 v1(57.3,47.8)
  Bottom Layer w0.5: v1(57.3,47.8) 57.43,47.93 U2_U_FAA.3
NetC1aE5_U_FAA_2: C1aE5_U_FAA.2 C1bE5_U_FAA.1 | length 2.7
  Top Layer w0.5: C1bE5_U_FAA.1 50.143,47.625 C1aE5_U_FAA.2
NetC1aE5_U_FR_1: C1aE5_U_FR.1 R2E5_U_FR.2 U2_U_FR.3 | length 7.6
  Top Layer w0.5: v1(20.015,15.275) R2E5_U_FR.2 22.432,18.2 C1aE5_U_FR.1
  Bottom Layer w0.5: U2_U_FR.3 20.045,15.245 v1(20.015,15.275)
NetC1aE5_U_FR_2: C1aE5_U_FR.2 C1bE5_U_FR.1 | length 2.7
  Top Layer w0.5: C1aE5_U_FR.2 24.686,20.518 C1bE5_U_FR.1
NetC1bE4_U_FAA_1: C1bE4_U_FAA.1 C1E4_U_FAA.2 | length 3
  Top Layer w0.5: C1E4_U_FAA.2 37.557,42.575 C1bE4_U_FAA.1
NetC1bE4_U_FR_1: C1bE4_U_FR.1 C1E4_U_FR.2 | length 3.5
  Bottom Layer w0.5: C1E4_U_FR.2 68.282,18.475 C1bE4_U_FR.1
NetC1E4_U_FAA_1: C1E4_U_FAA.1 R2aE4_U_FAA.2 U1_U_FAA.12 | length 8.8
  Top Layer w0.5: v1(29.85,42.525) 32.682,42.525 32.832,42.375 R2aE4_U_FAA.2
  Bottom Layer w0.5: U1_U_FAA.12 29.49,42.165 v1(29.85,42.525)
NetC1E4_U_FR_1: C1E4_U_FR.1 R2aE4_U_FR.2 U1_U_FR.12 | length 7.3
  Bottom Layer w0.5: U1_U_FR.12 62.322,18.065 C1E4_U_FR.1 63.525,19.268 63.525,19.85 64.35,20.675 65.268,20.675 R2aE4_U_FR.2
NetC2aE1_U_FAA_1: C2aE1_U_FAA.1 R1E1_U_FAA.2 R2E1_U_FAA.1 | length 5.5
  Top Layer w0.5: C2aE1_U_FAA.1 9.1,42.682 R1E1_U_FAA.2 8.993,42.375 R2E1_U_FAA.1
NetC2aE1_U_FAA_2: C2aE1_U_FAA.2 C2bE1_U_FAA.1 | length 3.9
  Top Layer w0.5: C2aE1_U_FAA.2 12.925,47.393 C2bE1_U_FAA.1
NetC2aE1_U_FR_1: C2aE1_U_FR.1 R1E1_U_FR.2 R2E1_U_FR.1 | length 5
  Top Layer w0.5: C2aE1_U_FR.1 42.45,18.218 R1E1_U_FR.2@44.739,18.218
NetC2aE1_U_FR_2: C2aE1_U_FR.2 C2bE1_U_FR.1 | length 2.9
  Top Layer w0.5: C2aE1_U_FR.2 45.25,23.168 C2bE1_U_FR.1
NetC2aE2_U_FAA_1: C2aE2_U_FAA.1 C2bE2_U_FAA.1 R1E2_U_FAA.2 R2E2_U_FAA.1 | length 8.4
  Bottom Layer w0.5: R1E2_U_FAA.2 12.525,37.607 R2E2_U_FAA.1 12.8,36.368 C2bE2_U_FAA.1 13,34.268 C2aE2_U_FAA.1
NetC2aE2_U_FAA_2: C2aE2_U_FAA.2 C2bE2_U_FAA.2 R1E3_U_FAA.1 U1_U_FAA.6 U1_U_FAA.7 | length 34.4
  Top Layer w0.5: v1(18.6,28.65) 19.157,29.207 R1E3_U_FAA.1
  Bottom Layer w0.5: C2bE2_U_FAA.2 15.1,32.182 C2aE2_U_FAA.2 U1_U_FAA.7@19.217,31.982 ; v1(18.6,28.65) 18.6,31.365 U1_U_FAA.7@19.217,31.982 ; U1_U_FAA.6 U1_U_FAA.7 U1_U_FAA.7@19.217,31.982
NetC2aE2_U_FR_1: C2aE2_U_FR.1 C2bE2_U_FR.1 R1E2_U_FR.2 R2E2_U_FR.1 | length 10.5
  Top Layer w0.5: R1E2_U_FR.2 C2aE2_U_FR.1@40.375,4.932 ; C2aE2_U_FR.1 C2aE2_U_FR.1@40.375,4.932 ; C2bE2_U_FR.1 43.025,7.857 R2E2_U_FR.1 40.175,5.132 C2aE2_U_FR.1@40.375,4.932
NetC2aE2_U_FR_2: C2aE2_U_FR.2 C2bE2_U_FR.2 R1E3_U_FR.1 U1_U_FR.6 U1_U_FR.7 | length 36
  Top Layer w0.5: C2aE2_U_FR.2 44.65,4.525 45.593,5.468 C2bE2_U_FR.2 v1(48.95,7.575) ; v1(67,6.025) 68.525,7.55 R1E3_U_FR.1
  Bottom Layer w0.5: v1(48.95,7.575) 49.28,7.905 U1_U_FR.7 ; U1_U_FR.6 U1_U_FR.7 ; v1(67,6.025) 63.975,3 56.945,3 U1_U_FR.7
NetC2aE3_U_FAA_1: C2aE3_U_FAA.1 R1E3_U_FAA.2 R2E3_U_FAA.1 | length 10
  Top Layer w0.5: R2E3_U_FAA.1 39.9,33.825 v1(40.075,34) 40.075,31.518 R1E3_U_FAA.2
  Bottom Layer w0.5: C2aE3_U_FAA.1 40.025,34.05 v1(40.075,34)
NetC2aE3_U_FAA_2: C2aE3_U_FAA.2 C2bE3_U_FAA.1 | length 2.7
  Bottom Layer w0.5: C2bE3_U_FAA.1 34.832,33.875 C2aE3_U_FAA.2
NetC2aE3_U_FR_1: C2aE3_U_FR.1 R1E3_U_FR.2 R2E3_U_FR.1 | length 7.1
  Top Layer w0.5: R2E3_U_FR.1 70.518,12.7 71.675,12.7 72.368,12.007 C2aE3_U_FR.1 72.368,7.65 R1E3_U_FR.2
NetC2aE3_U_FR_2: C2aE3_U_FR.2 C2bE3_U_FR.1 | length 2.7
  Top Layer w0.5: C2bE3_U_FR.1@67.468,10.05 69.993,10.05 C2aE3_U_FR.2@70.1,9.943
NetC2aE4_U_FAA_1: C2aE4_U_FAA.1 C2bE4_U_FAA.1 R1bE4_U_FAA.2 R2bE4_U_FAA.1 | length 21
  Top Layer w0.5: C2aE4_U_FAA.1 34.693,45.2 C2bE4_U_FAA.1 36.768,45.15 R1bE4_U_FAA.2 37.1,44.7 37.95,43.85 43.125,43.85 44.438,42.537 44.438,41.363 43.353,40.278 42.178,40.278 41.425,39.525 R2bE4_U_FAA.1
NetC2aE4_U_FAA_2: C2aE4_U_FAA.2 C2bE4_U_FAA.2 R1E5_U_FAA.1 U1_U_FAA.13 U1_U_FAA.14 | length 16.4
  Top Layer w0.5: v1(29.825,45.075) 29.9,45.15 C2bE4_U_FAA.2 32.407,45.2 C2aE4_U_FAA.2 32.407,50.007 33.325,50.925 R1E5_U_FAA.1
  Bottom Layer w0.5: U1_U_FAA.14 U1_U_FAA.13 27.23,45.075 v1(29.825,45.075)
NetC2aE4_U_FR_1: C2aE4_U_FR.1 C2bE4_U_FR.1 R1bE4_U_FR.2 R2bE4_U_FR.1 | length 10.6
  Bottom Layer w0.5: R2bE4_U_FR.1 70.643,21.875 R1bE4_U_FR.2 73.882,23.711 C2aE4_U_FR.1 72.168,25.425 C2bE4_U_FR.1
NetC2aE4_U_FR_2: C2aE4_U_FR.2 C2bE4_U_FR.2 R1E5_U_FR.1 U1_U_FR.13 U1_U_FR.14 | length 92.7
  Top Layer w0.5: R1E5_U_FR.1 27.8,8.15 32.9,3.05 59.175,3.05 60.35,4.225 60.35,5.1 59.575,5.875 58.75,5.875 56.25,8.375 56.25,24.25 57.975,25.975 61.35,25.975 62.325,25 v1(62.325,21.675)
  Bottom Layer w0.5: v1(62.325,21.675) 61.255,20.605 U1_U_FR.13 U1_U_FR.14 61.765,25.25 C2aE4_U_FR.2 70.057,27.975 C2bE4_U_FR.2
NetC2aE5_U_FAA_1: C2aE5_U_FAA.1 R1E5_U_FAA.2 R2E5_U_FAA.1 | length 13.5
  Top Layer w0.5: R1E5_U_FAA.2 40.243,53.55 C2aE5_U_FAA.1 42.25,53.207 42.25,52 43.475,50.775 R2E5_U_FAA.1
NetC2aE5_U_FAA_2: C2aE5_U_FAA.2 C2bE5_U_FAA.1 | length 7.1
  Top Layer w0.5: C2aE5_U_FAA.2 50.982,53.55 C2bE5_U_FAA.1
NetC2aE5_U_FR_1: C2aE5_U_FR.1 R1E5_U_FR.2 R2E5_U_FR.1 | length 6.1
  Top Layer w0.5: C2aE5_U_FR.1 24.95,15.043 R2E5_U_FR.1 27.657,15.275 R1E5_U_FR.2
NetC2aE5_U_FR_2: C2aE5_U_FR.2 C2bE5_U_FR.1 | length 2.7
  Top Layer w0.5: C2bE5_U_FR.1 24.7,9.857 C2aE5_U_FR.2
NetC2bE1_U_FAA_2: C2bE1_U_FAA.2 R1E2_U_FAA.1 U1_U_FAA.1 U1_U_FAA.2 | length 18
  Top Layer w0.5: C2bE1_U_FAA.2 16.85,49.032 v1(16.85,49.525)
  Bottom Layer w0.5: R1E2_U_FAA.1 12.525,43.05 16.72,47.245 U1_U_FAA.1 ; v1(16.85,49.525) 16.96,49.525 U1_U_FAA.1 ; U1_U_FAA.2 U1_U_FAA.1
NetC2bE1_U_FR_2: C2bE1_U_FR.2 R1E2_U_FR.1 U1_U_FR.1 U1_U_FR.2 | length 34.5
  Top Layer w0.5: R1E2_U_FR.1 36.75,7.293 v1(36.75,10.125) ; v1(47.225,25.225) 47.225,23.293 47.4,23.468 C2bE1_U_FR.2
  Bottom Layer w0.5: v1(36.75,10.125) 36.75,17.375 44.5,25.125 49.375,25.125 51.355,23.145 U1_U_FR.1 U1_U_FR.2
NetC2bE3_U_FAA_2: C2bE3_U_FAA.2 R1aE4_U_FAA.1 U1_U_FAA.8 U1_U_FAA.9 | length 51
  Top Layer w0.5: v1(39.05,46.05) 40.093,46.05 40.918,45.225 R1aE4_U_FAA.1
  Bottom Layer w0.5: C2bE3_U_FAA.2 29.462,34.545 U1_U_FAA.9 U1_U_FAA.8 46.955,32.005 49.275,34.325 49.275,40.65 43.875,46.05 v1(39.05,46.05)
NetC2bE3_U_FR_2: C2bE3_U_FR.2 R1aE4_U_FR.1 U1_U_FR.8 U1_U_FR.9 | length 25.5
  Top Layer w0.5: v1(62.8,10.075) 62.825,10.05 C2bE3_U_FR.2@65.182,10.05
  Bottom Layer w0.5: U1_U_FR.8 U1_U_FR.9 60.03,10.075 v1(62.8,10.075) 71.468,10.075 R1aE4_U_FR.1
NetD1_1: D1.1 D2.2 OSC_C2.1 TP5.1 U.2 U.6 | length 72.3
  Bottom Layer w0.5: D1.1 127.3,36.005 D2.2 135.665,35.83 U.6 136.87,36.095 140.475,39.7 140.475,44.675 141.675,45.875 161.65,45.875 162.7,44.825 162.7,42.2 161.925,41.425 158,41.425 154.95,38.375 152.435,38.375 OSC_C2.1 ; U.2 147.02,33.555 150.42,36.955 OSC_C2.1@150.65,36.955
NetD1_2: D1.2 OSC_Rdt.1 | length 47.5
  Bottom Layer w0.5: D1.2 123.175,18.175 129.525,11.825 OSC_Rdt.1@160.35,11.825
NetD2_1: D2.1 OSC_Rdt.3 | length 41.5
  Bottom Layer w0.5: D2.1 127.475,21.225 132.35,16.35 155.075,16.35 OSC_Rdt.3
NetJ2_1: J2.1 J3.2 SH_U1.5 TP10.1 | length 33.1
  Bottom Layer w0.5: J2.1 79.645,44.985 SH_U1.5 82.29,43.69 83.4,44.8 90.6,44.8 91.525,43.875 97.7,43.875 TP10.1@98.775,42.8 ; TP10.1 103.475,43.725 J3.2
NetJ2_3: J2.3 SH_U1.3 | length 12
  Bottom Layer w0.5: J2.3 76.735,50.065 79.4,47.4 82.27,47.4 SH_U1.3
NetJ3_1: J3.1 LL_U1.2 | length 9.6
  Bottom Layer w0.5: J3.1 104.835,41.035 109.75,45.95 LL_U1.2 LL_U1.2@110.79,46.115
NetJ3_3: J3.3 J4.2 LL_U1.1 TP11.1 | length 39.1
  Top Layer w0.5: v1(98.325,35.925) 100.85,38.45 v1(100.85,47) ; v1(114.65,48.225) 114.65,52.475 v1(115.025,52.85)
  Bottom Layer w0.5: J4.2@98.325,32.225 v1(98.325,35.925) ; v1(100.85,47) 101.735,46.115 J3.3 104.59,46.115 106.965,48.49 LL_U1.1 114.385,48.49 v1(114.65,48.225) ; v1(115.025,52.85) 115.85,53.675 TP11.1
NetLL_U1_13: LL_U1.13 OSC_R1.1 SH_U1.8 TP4.1 U.7 | length 81.7
  Top Layer w0.5: v1(111.475,29.825) 116.1,34.45 v1(116.1,45.45)
  Bottom Layer w0.5: SH_U1.8 90.195,42.625 94.975,42.625 100.525,37.075 100.525,36.45 107.15,29.825 v1(111.475,29.825) ; TP4.1 111.475,25.7 v1(111.475,29.825) ; v1(116.1,45.45) 116.6,45.95 LL_U1.13 ; U.7@135.425,33.05 U.7 ; U.7@135.875,33.4 OSC_R1.1 127.875,33.4 125.2,30.725 125.2,30.4 112.05,30.4 v1(111.475,29.825)
NetOSC_C1_1: OSC_C1.1 U.5 | length 5.3
  Bottom Layer w0.5: U.5 135.93,40.945 OSC_C1.1
NetOSC_CD1_1: OSC_CD1.1 OSC_R1.2 OSC_R2.2 REG_C2.1 REG_U1.3 TP8.1 U.4 U.8 | length 69.4
  Top Layer w0.5: REG_C2.1 142,48.125 146.35,43.775 v1(146.35,41.1)
  Bottom Layer w0.5: REG_U1.3 126.825,58.925 TP8.1 132.425,49.985 REG_C2.1 ; OSC_R2.2 131.825,22.34 OSC_R1.2 136.75,23.24 OSC_CD1.1 135.93,26.18 U.8 138.065,31.015 140.525,33.475 140.525,36.575 142.585,38.635 U.4 143.885,38.635 v1(146.35,41.1)
NetOSC_R2_1: OSC_R2.1 OSC_R3.2 OSC_Rfreq.1 | length 23.3
  Bottom Layer w0.5: OSC_R2.1 144.575,19.975 151.925,27.325 OSC_R3.2 160.275,30.34 OSC_Rfreq.1
NetOSC_Rdt_2: OSC_Rdt.2 OSC_Rfreq.2 | length 24.1
  Bottom Layer w0.5: OSC_Rfreq.2 160.75,38.45 162.725,36.475 162.725,19 OSC_Rdt.2
NetOSC_Rfreq_3: OSC_Rfreq.3 U.3 | length 19.6
  Bottom Layer w0.5: U.3 147.02,36.095 154.575,43.65 160.075,43.65 OSC_Rfreq.3
NetR1aE4_U_FAA_2: R1aE4_U_FAA.2 R1bE4_U_FAA.1 | length 4.2
  Top Layer w0.5: R1bE4_U_FAA.1 41.175,47.768 R1aE4_U_FAA.2
NetR1aE4_U_FR_2: R1aE4_U_FR.2 R1bE4_U_FR.1 | length 4
  Bottom Layer w0.5: R1bE4_U_FR.1 76.168,19.775 R1aE4_U_FR.2
NetR2aE4_U_FAA_1: R2aE4_U_FAA.1 R2bE4_U_FAA.2 | length 2.7
  Top Layer w0.5: R2aE4_U_FAA.1 35.318,39.525 R2bE4_U_FAA.2
NetR2aE4_U_FR_1: R2aE4_U_FR.1 R2bE4_U_FR.2 | length 3.3
  Bottom Layer w0.5: R2aE4_U_FR.1 66.539,23.143 R2bE4_U_FR.2
NetSH_C1_1: SH_C1.1 SH_U1.6 | length 4.1
  Bottom Layer w0.5: SH_C1.1 82.09,39.6 SH_U1.6
SIGNAL_IN: J1.2 SIGNAL_in.2 TP7.1 | length 13.8
  Bottom Layer w0.5: TP7.1 SIGNAL_in.2 4.585,54.475 J1.2
pads on no net: LL_U1.3 LL_U1.5 LL_U1.6 LL_U1.9 LL_U1.10 LL_U1.12 REG_U1. SH_U1.2 U2_U_FAA.1 U2_U_FAA.5 U2_U_FAA.8 U2_U_FR.1 U2_U_FR.5 U2_U_FR.8

## Keep-outs
Keep-Out Layer:
  the board outline again, w0.254

## Silkscreen, mask and mechanical layers (free items; w line width, h text height)
Top Overlay:
  text "TP1 ASSD G3" at 102.5,2.5 h5

## Text inside footprints (layer, text, board x,y; h text height)
REG_U1: Mechanical 13 "1" at 120.394,65.275 h1.27; Mechanical 13 "2" at 122.939,65.275 h1.27; Mechanical 13 "3" at 125.48,65.275 h1.27